# Altium PCB main.PcbDoc
Units mm, origin at the board's own origin, x right, y up, seen from the top; angles counter-clockwise.
Board outline 38.1 x 25.4 mm, 2 copper layers (Top Layer, Bottom Layer); 5 components, 11 nets, 41 pads, 0 vias.
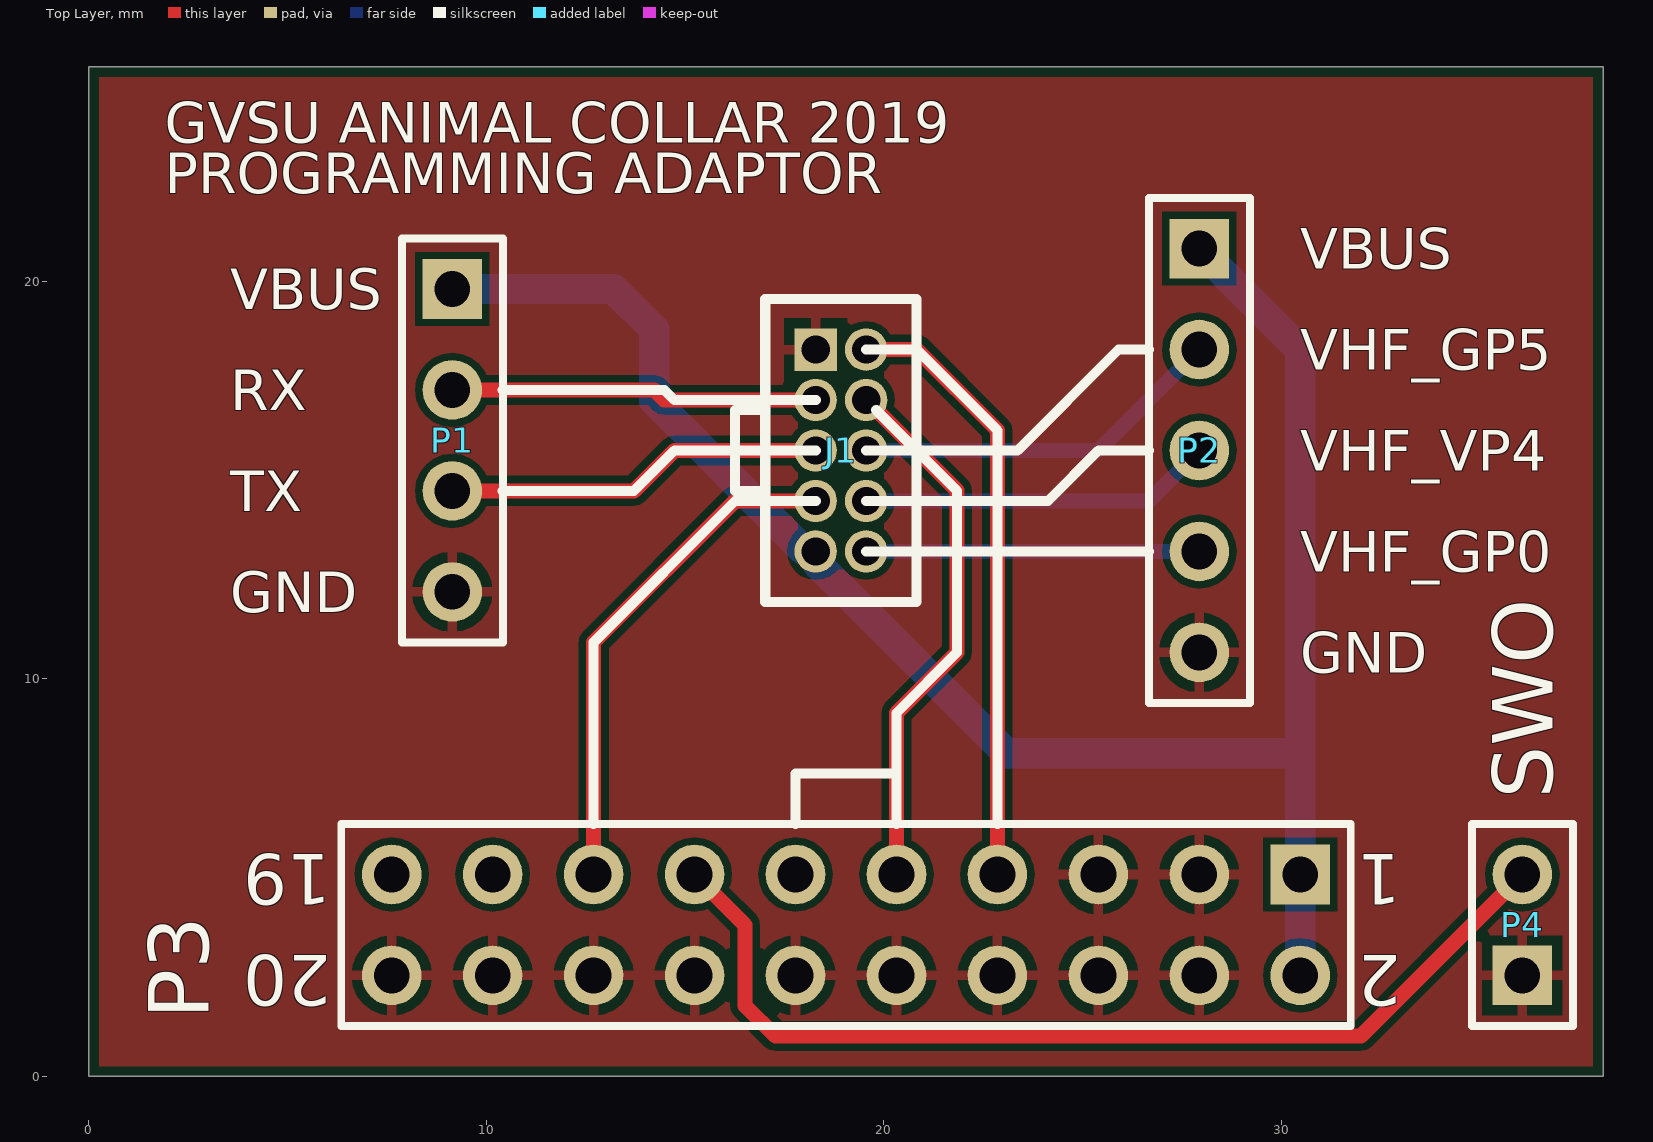
[diagram p0: Top Layer view]
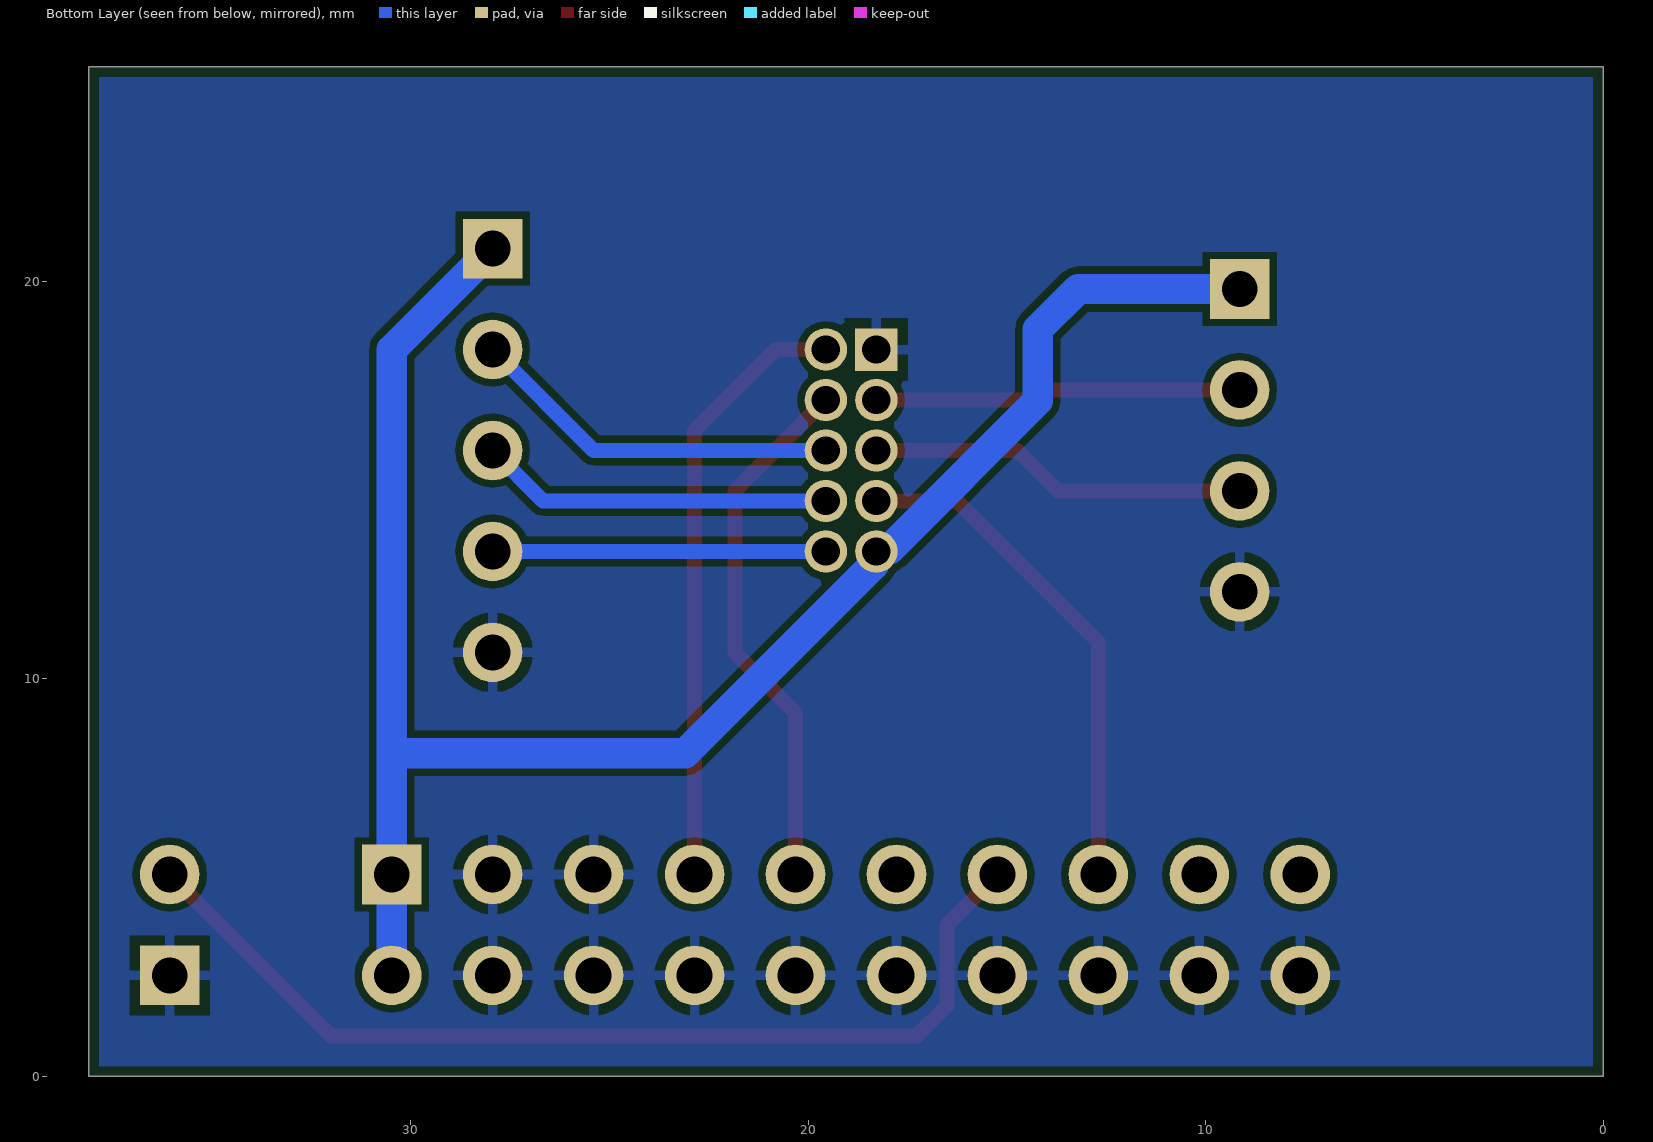
[diagram p1: Bottom Layer view, seen from below]

## Layer stack, top to bottom
Top Solder: solder mask 0.0102, Solder Resist, Dk 3.5
Top Layer: signal copper 0.0356
Dielectric 1: dielectric 0.32, FR-4, Dk 4.8
Bottom Layer: signal copper 0.0356
Bottom Solder: solder mask 0.0102, Solder Resist, Dk 3.5

## Board outline
0,0 38.1,0 38.1,25.4 0,25.4

## Design rules (kind name [scope] priority, off if disabled: settings)
BoardOutlineClearance [All] p1: gap=0.254 ignorepadtopadclearanceinfootprint=FALSE
Clearance [All] p1: gap=0.178 ignorepadtopadclearanceinfootprint=FALSE
ComponentClearance isLightPipe [InComponent('LP*')] p1: gap=0 collisioncheckmode=3 verticalgap=0 showdistances=FALSE
ComponentClearance isTestPoint [InComponent('TP*')] p2: gap=0 collisioncheckmode=3 verticalgap=0 showdistances=FALSE
ComponentClearance [All] p3: gap=0.254 collisioncheckmode=3 verticalgap=0.254 showdistances=FALSE
HoleSize [All] p1: absolutevalues=TRUE maxlimit=152.4 minlimit=0.305 maxpercent=80.000 minpercent=20.000
MinimumSolderMaskSliver [All] p1: minsoldermaskwidth=0
PolygonConnect IsGround [InNet('GND')] p1: thpad.connectstyle=Relief thpad.reliefconductorwidth=0.254 thpad.reliefentries=4 thpad.polygonreliefangle="90 Angle" thpad.airgapwidth=0.254 smdpad.connectstyle=Relief smdpad.reliefconductorwidth=0.254 smdpad.reliefentries=4 smdpad.polygonreliefangle="90 Angle" smdpad.airgapwidth=0.254 via.connectstyle=Direct via.reliefconductorwidth=0.254 via.reliefentries=4 via.polygonreliefangle="90 Angle" via.airgapwidth=0.254
PolygonConnect IsntGround [All] p2: connectstyle=Direct reliefconductorwidth=0.254 reliefentries=4 polygonreliefangle="90 Angle" airgapwidth=0.254
RoutingVias [All] p1: holewidth=0.305 width=0.559 viastyle="Through Hole" minholewidth=0.305 minwidth=0.559 maxholewidth=0.635 maxwidth=1.27
SilkToSilkClearance [All] p1: silktosilkclearance=0
SilkToSolderMaskClearance [IsPad] p1: minsilkscreentomaskgap=0 clearancetoexposedcopper=TRUE
SolderMaskExpansion [All] p1: expansion=0.102
Width Power [InNetClass('Power')] p1: maxlimit=0.762 minlimit=0.254 preferedwidth=0.508
Width "50_OHM WIDTH" [InNetClass('50 OHM')] p2: maxlimit=0.254 minlimit=0.254 preferedwidth=0.254
Width "regular trace" [All] p3: maxlimit=0.381 minlimit=0.178 preferedwidth=0.254
25 further rules are at their usual default settings.

## Classes and differential pairs
net class POWER: VBUS

## Components (designator, comment, footprint, x,y, rotation, side; value= is the part's Value field where it differs from the comment)
J1 "10 PIN" FTSH-105-01-F-D-K 18.288,18.288 r270 top
P1 "Header 4" HDR1X4 9.144,19.812 r270 top
P2 "Header 5" HDR1X5 27.94,20.828 r270 top
P3 "Header 10X2" HDR2X10 30.48,5.08 r180 top
P4 "Header 2" HDR1X2 36.068,2.54 r90 top

## Footprints (in the part's own frame and the unit in brackets; to place one, negate y for a bottom-side part, rotate by r counter-clockwise, add the part's x,y. Pads: shape width x height; smd on the part's side, far side on the other; paste and mask are expansions set on the pad)
FTSH-105-01-F-D-K [mil] "FTSH-105-01-F-D-K"
  rect 42x42 hole 28: 1(0,0)
  round 42 hole 28: 2(50,0) 3(100,0) 4(150,0) 5(200,0) 6(0,50) 7(50,50) 8(100,50) 9(150,50) 10(200,50)
  silkscreen extent -50,-50 250,100, body extent -50,-50 250,100, height 126
HDR1X2 [mm] "Connector; Header; 2 Position"
  rect 1.5x1.5 hole 0.9: 1(0,0)
  round 1.5 hole 0.9: 2(2.54,0)
  silkscreen extent -1.27,-1.27 3.81,1.27
HDR1X4 [mm] "Connector; Header; 4 Position"
  rect 1.5x1.5 hole 0.9: 1(0,0)
  round 1.5 hole 0.9: 2(2.54,0) 3(5.08,0) 4(7.62,0)
  silkscreen extent -1.27,-1.27 8.89,1.27
HDR1X5 [mm] "Connector; Header; 5 Position"
  rect 1.5x1.5 hole 0.9: 1(0,0)
  round 1.5 hole 0.9: 2(2.54,0) 3(5.08,0) 4(7.62,0) 5(10.16,0)
  silkscreen extent -1.27,-1.27 11.43,1.27
HDR2X10 [mm] "Connector; Header; 10x2 Position"
  rect 1.5x1.5 hole 0.9: 1(0,0)
  round 1.5 hole 0.9: 2(0,2.54) 3(2.54,0) 4(2.54,2.54) 5(5.08,0) 6(5.08,2.54) 7(7.62,0) 8(7.62,2.54) 9(10.16,0) 10(10.16,2.54) 11(12.7,0) 12(12.7,2.54) 13(15.24,0) 14(15.24,2.54) 15(17.78,0) 16(17.78,2.54) 17(20.32,0) 18(20.32,2.54) 19(22.86,0) 20(22.86,2.54)
  silkscreen extent -1.27,-1.27 24.13,3.81

## Part data
J1: library part FTSH-105-01-F-D-K, "10 Pin Programming Header", Manufacturer 1="Samtec Inc.", Supplier Part Number 1=SAM8909-ND, Manufacturer Part Number 1=FTSH-105-01-F-D-K, Supplier 1=Digikey
P1: "Header, 4-Pin", LatestRevisionDate=17-Jul-2002, LatestRevisionNote="Re-released for DXP Platform.", Publisher="Altium Limited"
P2: "Header, 5-Pin", LatestRevisionDate=17-Jul-2002, LatestRevisionNote="Re-released for DXP Platform.", Publisher="Altium Limited"
P3: "Header, 10-Pin, Dual row", LatestRevisionDate=17-Jul-2002, LatestRevisionNote="Re-released for DXP Platform.", Publisher="Altium Limited"
P4: "Header, 2-Pin", LatestRevisionDate=17-Jul-2002, LatestRevisionNote="Re-released for DXP Platform.", Publisher="Altium Limited"

## Nets (pads, with @x,y where several pads share a name; then routed paths per layer and width w, separated by ;. In a path a pad name is that pad's centre, name@x,y a point inside that pad or via, vN(x,y) a via of type N, cw(c..) or ccw(c..) an arc to the next point about the centre after c; other vN are vias at no path point)
GND: J1.1 P1.4 P2.5 P3.3 P3.4 P3.5 P3.6 P3.8 P3.10 P3.12 P3.14 P3.16 P3.18 P3.20 P4.1
NRST: J1.4 P3.15 | length 12.9
  Top Layer w0.381: P3.15 12.7,10.922 16.256,14.478 J1.4
SWCLK: J1.7 P3.9 | length 13.5
  Top Layer w0.381: J1.7 19.563,17.018 21.844,14.737 21.844,10.668 20.32,9.144 P3.9
SWDIO: J1.6 P3.7 | length 15.3
  Top Layer w0.381: J1.6 20.828,18.288 22.86,16.256 P3.7
TDO_SWO: P3.13 P4.2 | length 25.4
  Top Layer w0.381: P3.13 16.51,3.81 16.51,1.778 17.272,1.016 32.004,1.016 P4.2
USART1_RX: J1.2 P1.2 | length 9.2
  Top Layer w0.381: P1.2 14.224,17.272 14.478,17.018 J1.2
USART1_TX: J1.3 P1.3 | length 9.6
  Top Layer w0.381: P1.3 13.716,14.732 14.732,15.748 J1.3
VBUS: J1.5 P1.1 P2.1 P3.1 P3.2 | length 46.7
  Bottom Layer w0.762: P1.1 13.208,19.812 14.224,18.796 14.224,16.997 17.955,13.266 18.23,13.266 J1.5 18.346,13.15 18.346,12.875 23.093,8.128 30.48,8.128 ; P2.1 30.48,18.288 30.48,8.128 ; P3.2 P3.1 30.48,8.128
VHF_GP0: J1.10 P2.4 | length 8.4
  Bottom Layer w0.381: J1.10 P2.4
VHF_GP4: J1.9 P2.3 | length 8.9
  Bottom Layer w0.381: J1.9 26.67,14.478 P2.3
VHF_GP5: J1.8 P2.2 | length 9.4
  Bottom Layer w0.381: J1.8 25.4,15.748 P2.2
pads on no net: P3.11 P3.17 P3.19

## Polygon pours and split planes (outlines as drawn)
GND on Top Layer (solid, pour order 0): 0,0 38.1,0 38.1,25.4 0,25.4
GND on Bottom Layer (solid, pour order 2): 0,0 38.1,0 38.1,25.4 0,25.4

## Silkscreen, mask and mechanical layers (free items; w line width, h text height)
Top Overlay:
  lines w0.254: 10.414,14.732 13.716,14.732 14.732,15.748 18.288,15.748 ; 10.414,17.272 14.478,17.272 14.732,17.018 18.288,17.018 ; 12.7,6.35 12.7,10.922 16.256,14.478 18.288,14.478 ; 17.018,14.732 16.256,14.732 16.256,16.764 17.018,16.764 ; 17.78,6.35 17.78,7.62 20.32,7.62 20.32,6.35 20.32,9.144 21.844,10.668 21.844,14.732 19.812,16.764 ; 19.558,13.208 26.67,13.208 ; 19.558,14.478 24.13,14.478 25.4,15.748 26.67,15.748 ; 19.558,15.748 23.368,15.748 25.908,18.288 26.67,18.288 ; 19.558,18.288 20.828,18.288 22.86,16.256 22.86,6.35
  text "GVSU ANIMAL COLLAR 2019" at 1.905,23.495 h1.02
  text "PROGRAMMING ADAPTOR" at 1.905,22.225 h1.02
  text "VBUS" at 30.48,20.32 h1.02
  text "VBUS" at 3.556,19.304 h1.02
  text "VHF_GP5" at 30.48,17.78 h1.02
  text "RX" at 3.556,16.764 h1.02
  text "VHF_VP4" at 30.48,15.24 h1.02
  text "TX" at 3.556,14.224 h1.02
  text "VHF_GP0" at 30.48,12.7 h1.02
  text "GND" at 3.556,11.684 h1.02
  text "GND" at 30.48,10.16 h1.02
  text "SWO" at 36.83,6.985 h1.52 r90
Mechanical 1:
  the board outline again, w1.2

## Text inside footprints (layer, text, board x,y; h text height)
P3: Top Overlay "20" at 6.096,3.048 h1.27 r180; Top Overlay "19" at 6.096,5.588 h1.27 r180; Top Overlay "1" at 33.02,5.588 h1.27 r180; Top Overlay "2" at 33.02,3.048 h1.27 r180